# Altium PCB DB10012_GyroNunchuck.PcbDoc
Units mm, origin at the board's own origin, x right, y up, seen from the top; angles counter-clockwise.
Board outline 26 x 44 mm, 2 copper layers (Top Layer, Bottom Layer), stack 1.571 mm thick; 4 components, 0 nets, 26 pads, 0 vias.
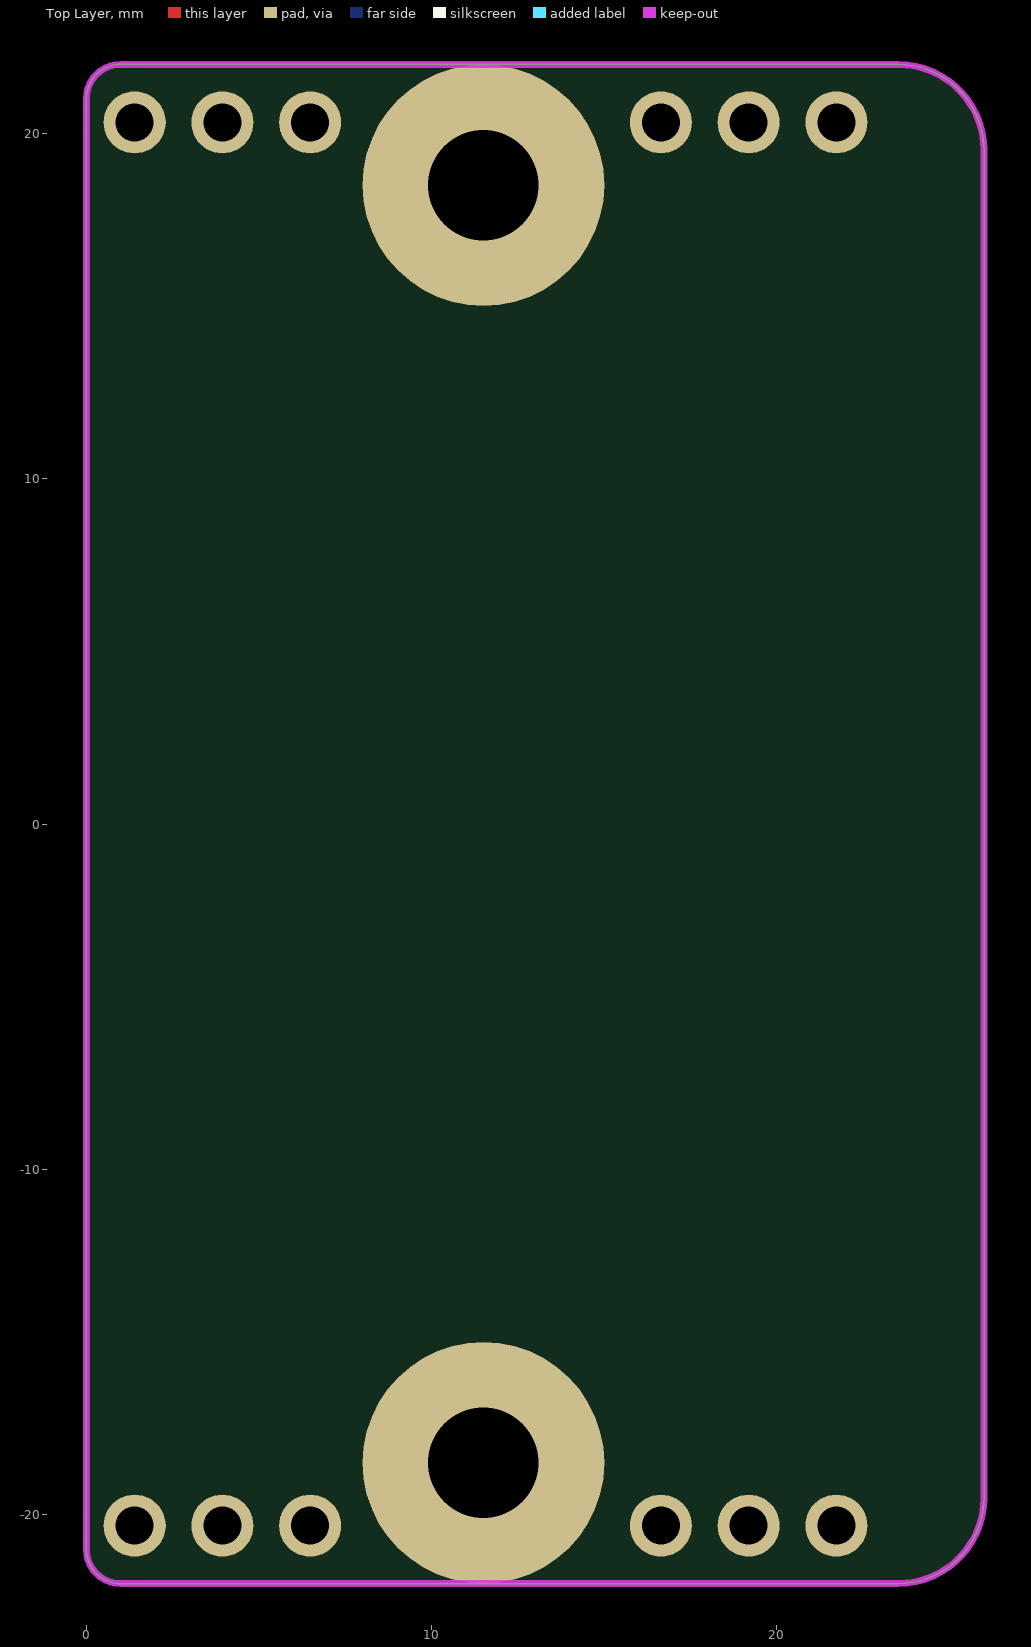
[diagram p0: Top Layer view]
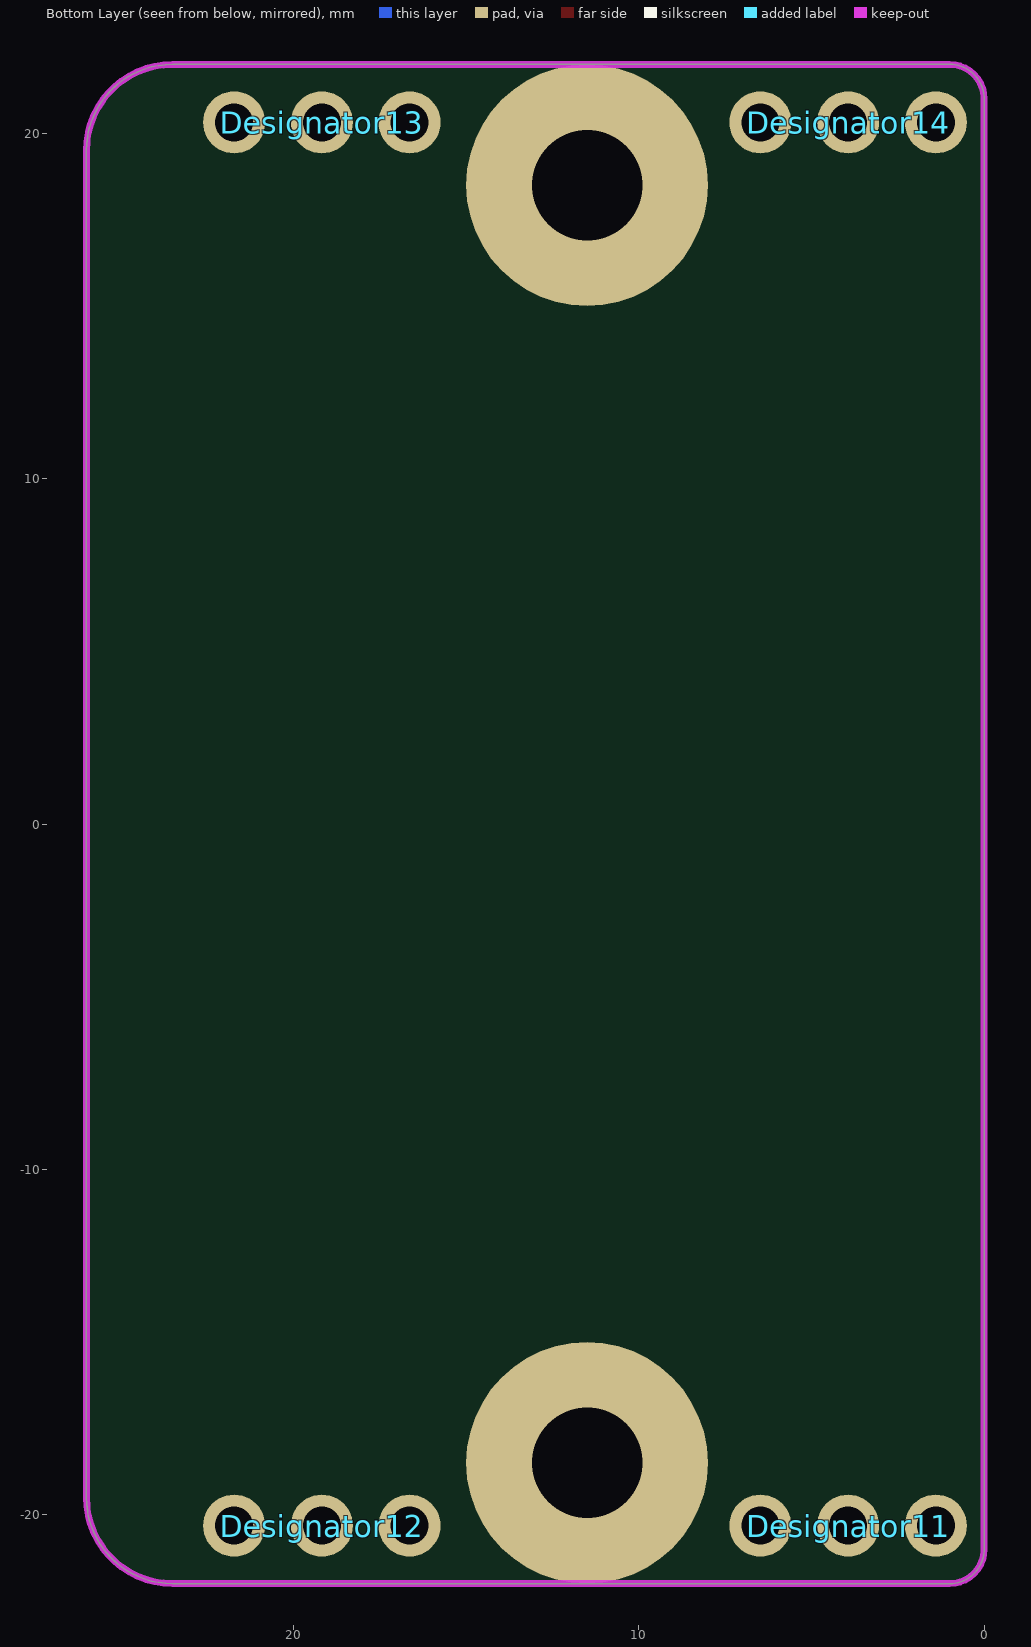
[diagram p1: Bottom Layer view, seen from below]

## Layer stack, top to bottom
Top Solder: solder mask 0.0102, Solder Resist, Dk 3.5
Top Layer: signal copper 0.0356
Dielectric 1: dielectric 1.5, FR-4, Dk 4.8
Bottom Layer: signal copper 0.0356
Bottom Solder: solder mask 0.0102, Solder Resist, Dk 3.5

## Board outline
0,-21 0,21 cw(c1,21) 1,22 23.5,22 cw(c23.5,19.5) 26,19.5 26,-19.5 cw(c23.5,-19.5) 23.5,-22 1,-22 cw(c1,-21)

## Design rules (kind name [scope] priority, off if disabled: settings)
Clearance [All] p1: gap=0.254
PolygonConnect [All] p1: connectstyle=Relief reliefconductorwidth=0.254 reliefentries=4 polygonreliefangle="90 Angle" airgapwidth=0.254
RoutingVias [All] p1: holewidth=0.711 width=1.27 viastyle="Through Hole" minholewidth=0.711 minwidth=1.27 maxholewidth=0.711 maxwidth=1.27
SolderMaskExpansion [All] p1: expansion=0.102
Width [All] p1: maxlimit=0.254 minlimit=0.254 preferedwidth=0.254
30 further rules are at their usual default settings.

## Components (designator, comment, footprint, x,y, rotation, side; value= is the part's Value field where it differs from the comment)
Designator11 "Comment" HEADER-2.54-3 6.48,-20.32 r180 bottom
Designator12 "Comment" HEADER-2.54-3 21.72,-20.32 r180 bottom
Designator13 "Comment" HEADER-2.54-3 21.72,20.32 r180 bottom
Designator14 "Comment" HEADER-2.54-3 6.48,20.32 r180 bottom

## Footprints (in the part's own frame and the unit in brackets; to place one, negate y for a bottom-side part, rotate by r counter-clockwise, add the part's x,y. Pads: shape width x height; smd on the part's side, far side on the other; paste and mask are expansions set on the pad)
HEADER-2.54-3 [mm]
  round 1.8 hole 1.1: 1(0,0) 2(2.54,0) 3(5.08,0)
  body extent -1.27,-1.27 6.35,1.27, height 8.57

## Free pads (board coordinates)
  round 7 / inner round 4.2 / far side round 7 hole 3.2: 0(11.5,-18.5) 0(11.5,18.5)
  round 1.8 hole 1: 17(3.94,-20.32) 18(6.48,-20.32) 23(1.4,20.32) 24(3.94,20.32) 25(16.64,-20.32) 25(16.64,20.32) 26(19.18,-20.32) 26(19.18,20.32) 27(21.72,-20.32) 27(21.72,20.32) 28(6.48,20.32) 29(1.4,-20.32)

## Nets (pads, with @x,y where several pads share a name; then routed paths per layer and width w, separated by ;. In a path a pad name is that pad's centre, name@x,y a point inside that pad or via, vN(x,y) a via of type N, cw(c..) or ccw(c..) an arc to the next point about the centre after c; other vN are vias at no path point)
pads on no net: Designator11.1 Designator11.2 Designator11.3 Designator12.1 Designator12.2 Designator12.3 Designator13.1 Designator13.2 Designator13.3 Designator14.1 Designator14.2 Designator14.3

## Keep-outs
Keep-Out Layer:
  the board outline again, w0.2